# EAGLE board piccolo_pcb_v0.9.1 (EAGLE 7.1.0)
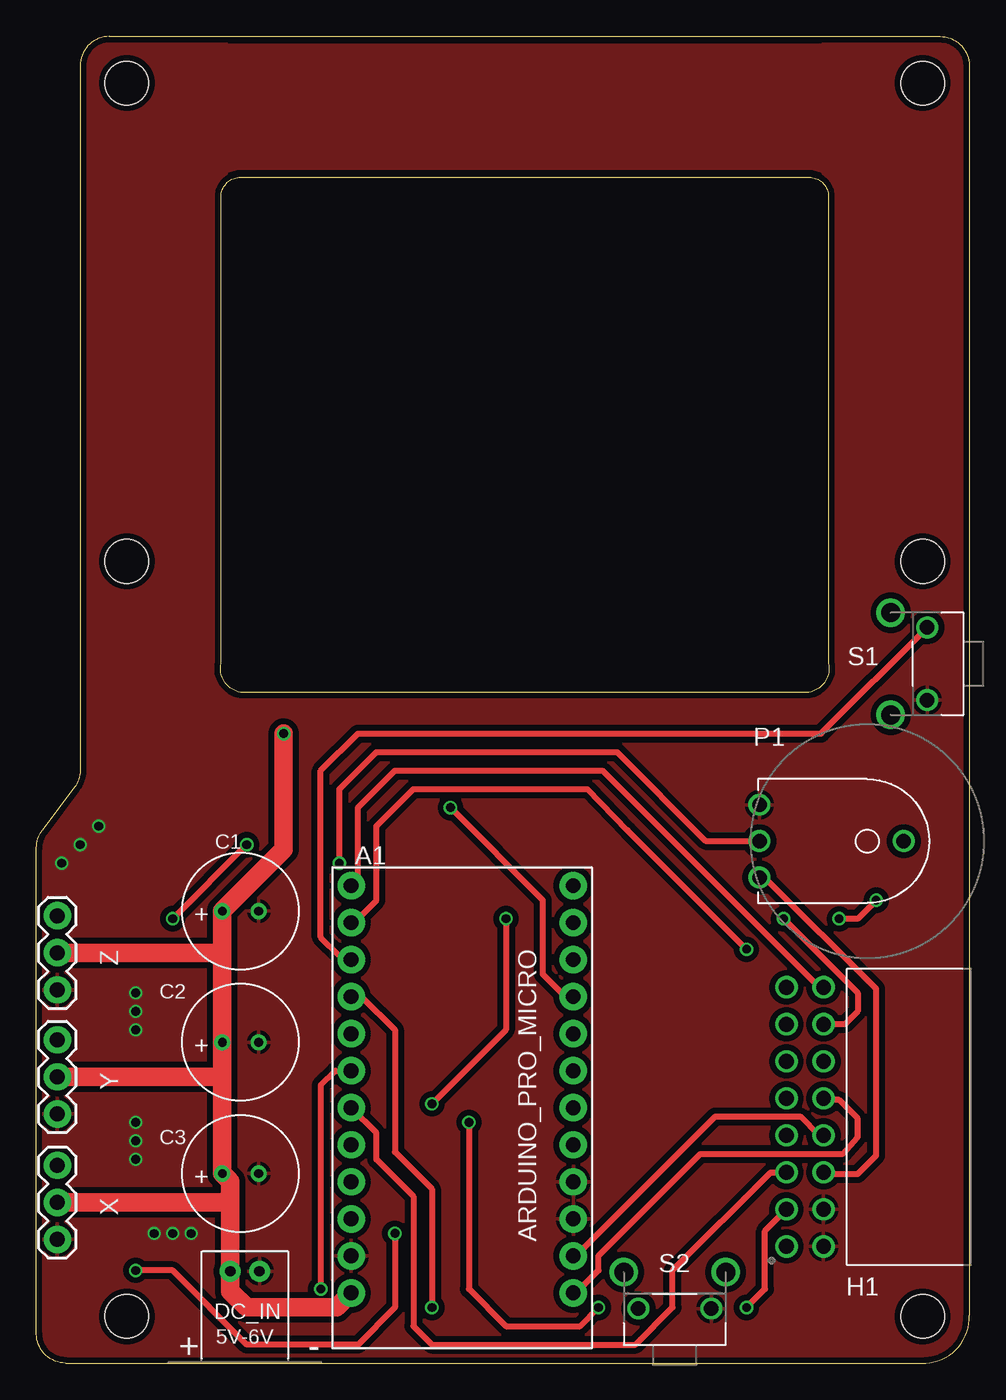
[diagram p0: board, top side]
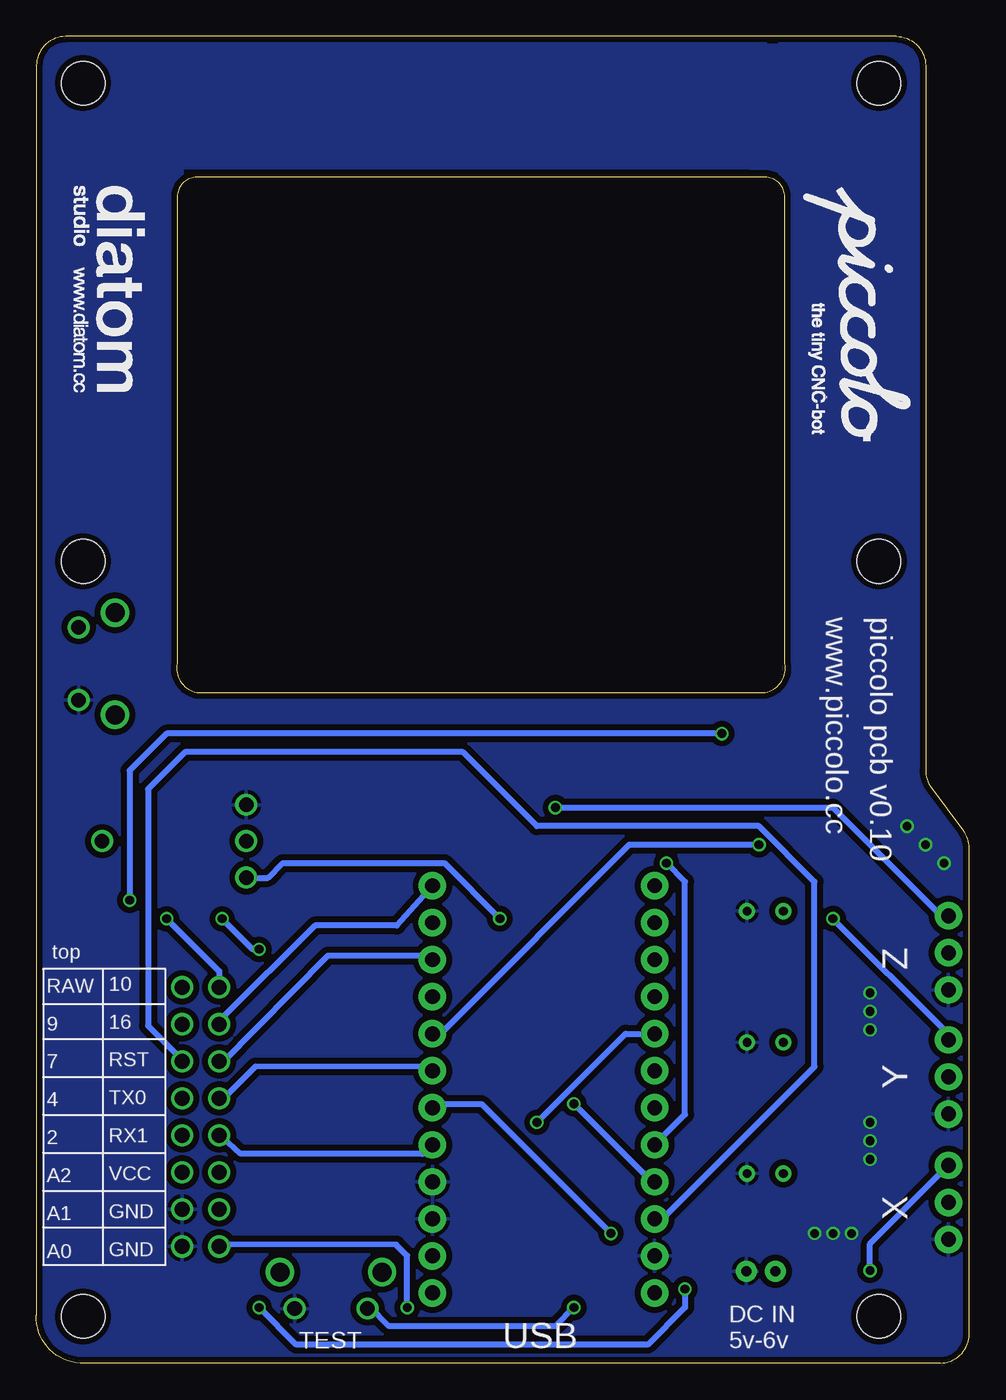
[diagram p1: board, bottom side, seen from below]

Size 64 x 91 mm. Coordinates in mm from the lower left corner, seen from the top.
Outline: 0,2 0,35.33 arc-37 0.4,36.53 2.6,39.47 arc37 3,40.67 3,89 arc-90 5,91 62,91 arc-90 64,89 64,3.27 arc-90 61,0 2,0 arc-90 0,2
Outline: 12.66,48 12.66,80 arc-90 14,81.34 53,81.34 arc-90 54.34,80 54.34,48 arc-90 53,46 14,46 arc-90 12.66,48
Copper layers (1*16): Top 0.035mm / dielectric 1.5mm / Bottom 0.035mm
Design rules "ITEADstudio_DRC": minimum track width 6mil, minimum drill 12mil, track to track 6mil, track to pad 6mil, pad to pad 6mil, via to via 6mil, smd to smd 0mil, copper to edge 10mil, drill to drill 10mil, minimum pad ring 10mil, minimum via ring 6mil, stop-mask expansion 2mil, vias tented up to drill 100mil, thermal gap 10mil
Holes 3 mm at 6.2,87.8 6.2,55 6.2,3.2 60.8,3.2 60.8,55 60.8,87.8

## Footprints (pad centres in the part's own frame; a part is rotated, then mirrored left to right if it is on the bottom)
ARDUINO_MINI = drill 1.016 pad 1.88: 1 -7.62,12.7; 2 -7.62,10.16; 3 -7.62,7.62; 4 -7.62,5.08; 5 -7.62,2.54; 6 -7.62,0; 7 -7.62,-2.54; 8 -7.62,-5.08; 9 -7.62,-7.62; 10 -7.62,-10.16; 11 -7.62,-12.7; 12 -7.62,-15.24; 13 7.62,-15.24; 14 7.62,-12.7; 15 7.62,-10.16; 16 7.62,-7.62; 17 7.62,-5.08; 18 7.62,-2.54; 19 7.62,0; 20 7.62,2.54; 21 7.62,5.08; 22 7.62,7.62; 23 7.62,10.16; 24 7.62,12.7
RADIAL_330UF = drill 0.6: A 0,1.25; C 0,-1.25
JST-PH-2-PTH = drill 0.7 pad 1.448: + -1,0; - 1,0
PTH_2X8_90DEG_FEMALE = drill 1.02: P$1 -2.54,0; P$2 0,0; P$3 -2.54,2.54; P$4 0,2.54; P$5 -2.54,5.08; P$6 0,5.08; P$7 -2.54,7.62; P$8 0,7.62; P$9 -2.54,10.16; P$10 0,10.16; P$11 -2.54,12.7; P$12 0,12.7; P$13 -2.54,15.24; P$14 0,15.24; P$15 -2.54,17.78; P$16 0,17.78
16MM_THUMBWHEEL = drill 1: P$1 -2.5,-7.4; P$2 0,-7.4; P$3 2.5,-7.4; P$4 0,2.5
RIGHT_ANGLE_TACTSWITCH = drill 1: 1 -2.5,0; 2 2.5,0 | drill 1.3: PE1 -3.5,2.5; PE2 3.5,2.5
1X03 = drill 1.016 pad 1.88: 1 0,0; 2 2.54,0; 3 5.08,0

## Placement (x,y rotation side)
A1  ARDUINO_PRO_MICRO  [ARDUINO_MINI]  29.21,17.51 180 top
C1  CAP_ELECTROLYTIC  [RADIAL_330UF]  14,31 90 top
C2  CAP_ELECTROLYTIC  [RADIAL_330UF]  14,22 90 top
C3  CAP_ELECTROLYTIC  [RADIAL_330UF]  14,13 90 top
DC_IN  4.8v-6.0v  [JST-PH-2-PTH]  14.3,6.3 0 top
H1  M08X2  [PTH_2X8_90DEG_FEMALE]  54,8 0 top
P1  [16MM_THUMBWHEEL]  57,35.8 270 top
S1  SWITCH_TACTILE  [RIGHT_ANGLE_TACTSWITCH]  61.11,47.97 90 top
S2  SWITCH_TACTILE  [RIGHT_ANGLE_TACTSWITCH]  43.79,3.74 0 top
U$1  [VHS-LOGO-SMALL]  41.1,81.28 0 bottom
X  [1X03]  1.43,8.48 90 top
Y  [1X03]  1.43,17.09 90 top
Z  [1X03]  1.43,25.6 90 top

## Library data of the parts
A1 = SparkFun-Boards
C1-C3 H1 P1 S1 S2 = Piccolo
DC_IN = Piccolo; 5V-6V: 5v-6v
U$1 = mechanical
X Y Z = SparkFun-Connectors

## Nets
A3: A1.20 P1.P$2
GND: A1.3 A1.4 A1.23 C1.C C2.C C3.C DC_IN.- H1.P$2 H1.P$4 P1.P$1 S1.1 S2.2 X.1 Y.1 Z.1
N$3: A1.15 S1.2
N$4: A1.16 S2.1
PIN2: A1.5 H1.P$7
PIN4: A1.7 H1.P$9
PIN7: A1.10 H1.P$11
PIN9: A1.12 H1.P$13
PIN10: A1.13 H1.P$16
PIN16: A1.14 H1.P$14
PIN_A0: A1.17 H1.P$1
PIN_A1: A1.18 H1.P$3
PIN_A2: A1.19 H1.P$5
PWR_RAW: A1.24 C1.A C2.A C3.A DC_IN.+ H1.P$15 X.2 Y.2 Z.2
RESET: A1.22 H1.P$12
RX: A1.2 H1.P$8
TX: A1.1 H1.P$10
VCC: A1.21 H1.P$6 P1.P$3
X_PWM_PIN3: A1.6 X.3
Y_PWM_PIN5: A1.8 Y.3
Z_PWM_PIN6: A1.9 Z.3

## Tracks (layer width: path | path; a pad name or v marks a point on that pad's centre or on a via)
A3  (via drill 0.61)
  Top 0.254: 49.99,35.83 P1.P$2
  Top 0.406: 49.99,35.83 45.91,35.83 39.83,41.91 23.32,41.91 20.78,39.37 v20.78,34.29
  Bottom 0.406: v20.78,34.29 19.51,33.02 19.51,17.05 A1.20
GND  (via drill 0.6)
  other vias: 8.08,8.89 9.35,8.89 10.62,8.89 6.81,16.51 6.81,15.24 6.81,13.97 6.81,25.4 6.81,24.13 6.81,22.86 3,35.56 4.27,36.83 1.73,34.29
  pour Bottom (isolate 0.406): 62,91 14,91 14,82 54,82 54,46 13,46 13,91 5,91 arc90 3,89 3,40 0,36 0,2 arc90 2,0 62,0 arc90 64,2 64,89 arc90
  pour Top (isolate 0.406): 62,91 54,91 54,46 13,46 13,91 5,91 arc90 3,89 3,40 0,36 0,2 arc90 2,0 62,0 arc90 64,3.27 64,90.27 arc90
  pour Bottom (isolate 0.5): 12,91 15,91 15,81 12,81
  pour Top (isolate 0.5): 13,91 54,91 54,81 13,81
N$3
  Top 0.406: A1.15 20.78,27.94 19.51,29.21 19.51,40.64 22.05,43.18 53.82,43.18 S1.2
N$4  (via drill 0.61)
  Top 0.406: v27.13,3.81 27.13,11.94 24.59,14.48 24.59,22.86 22.32,25.13 A1.16
  Bottom 0.406: v27.13,3.81 28.4,2.54 39.83,2.54 41.1,3.81 S2.1
PIN2
  Bottom 0.254: 51.26,15.51 H1.P$7
  Bottom 0.406: 51.26,15.51 49.99,14.37 37.54,14.35 A1.5
PIN4
  Bottom 0.254: 51.26,18.05 H1.P$9
  Bottom 0.406: 51.26,18.05 48.97,20.34 37.29,20.32 A1.7
PIN7
  Bottom 0.254: 51.26,20.59 H1.P$11
  Bottom 0.406: 51.26,20.59 44.02,27.94 37.29,27.94 A1.10
PIN9
  Bottom 0.406: 51.26,23.67 44.89,30.02 39.29,30.02 A1.12
  Bottom 0.61: H1.P$13 arc-90 51.26,23.44 51.26,23.67
PIN10
  Top 0.254: 53.8,25.67 H1.P$16
  Top 0.406: 53.8,25.67 38.83,40.64 24.59,40.64 22.05,38.1 22.05,33.02 A1.13
PIN16  (via drill 0.6)
  Top 0.406: A1.14 22.05,30.48 23.32,31.75 23.32,36.83 25.86,39.37 37.8,39.37 40.56,36.54 v48.72,28.38 | v51.26,30.48 56.34,25.4 56.34,24.13 55.45,23.24 H1.P$14
  Bottom 0.406: v48.72,28.38 49.16,28.38 v51.26,30.48
PIN_A0  (via drill 0.61, 0.61 pad 0.66)
  Top 0.406: v38.56,3.81 37.29,2.54 32.21,2.54 29.67,5.08 v29.67,16.51
  Bottom 0.254: 51.26,7.89 H1.P$1
  Bottom 0.406: 51.26,7.89 51.01,8.14 39.32,8.13 38.56,7.37 v38.56,3.81 | v29.67,16.51 23.59,22.59 A1.17
PIN_A1  (via drill 0.6, 0.61)
  Top 0.406: v19.51,5.08 19.51,19.05 20.51,20.05 A1.18 | v48.72,3.81 49.99,5.08 49.99,9.07 H1.P$3
  Bottom 0.406: v19.51,5.08 19.51,3.81 22.05,1.27 46.18,1.27 v48.72,3.81
PIN_A2
  Top 0.254: 51.26,13.1 H1.P$5
  Top 0.406: 51.26,13.1 50.37,13.08 43.64,6.35 43.64,3.81 41.1,1.27 27.13,1.27 25.86,2.54 25.86,11.43 23.32,13.97 23.32,15.78 A1.19
PWR_RAW  (via drill 0.6, 0.61)
  Top 0.406: v57.61,31.75 56.34,30.48 v55.07,30.48
  Top 1.27: 13.3,11.43 DC_IN.+ 13.3,4.94 14.43,3.81 20.59,3.81 A1.24 | 13.3,11.43 13.3,12.45 C3.A 12.75,19.63 | 12.75,19.63 C2.A 12.75,28.14 | 12.75,28.14 C1.A 16.97,35.22 v16.97,43.18 | X.2 12.89,11.02 13.3,11.43 | Y.2 12.75,19.63 | Z.2 12.75,28.14
  Bottom 0.25: 51.26,25.67 H1.P$15
  Bottom 0.406: v16.97,43.18 55.07,43.18 57.61,40.64 v57.61,31.75 | v55.07,30.48 51.46,26.87 H1.P$15
RESET
  Bottom 0.254: 53.8,20.59 H1.P$12 | 20.78,10.16 A1.22
  Bottom 0.406: 53.8,20.59 56.34,23.13 56.34,39.37 53.8,41.91 34.75,41.91 29.67,36.83 14.43,36.83 10.62,33.02 10.62,20.32 20.78,10.16
RX
  Top 0.254: 37.29,7.62 A1.2 | H1.P$8 53.69,15.62
  Top 0.406: 53.69,15.62 52.4,16.91 46.58,16.91 37.29,7.62
TX
  Top 0.254: 54.11,18.05 H1.P$10
  Top 0.406: A1.1 37.29,5.08 38.56,6.35 38.56,7.37 45.55,14.35 55.32,14.37 56.34,15.51 56.34,16.78 55.07,18.05 54.11,18.05
VCC  (via drill 0.61)
  Top 0.254: 49.99,33.29 P1.P$3 | 53.8,12.97 H1.P$6
  Top 0.406: 49.99,33.29 57.61,25.67 57.61,14.24 56.34,12.97 53.8,12.97 | v27.13,17.78 32.21,22.86 v32.21,30.48
  Bottom 0.254: 22.05,12.7 A1.21 | 49.99,33.29 P1.P$3
  Bottom 0.406: v27.13,17.78 22.05,12.7 | v32.21,30.48 36.02,34.29 47.1,34.3 48.11,33.29 49.99,33.29
X_PWM_PIN3  (via drill 0.6, 0.61)
  Top 0.406: v24.59,8.89 24.59,3.81 22.05,1.27 14.43,1.27 9.35,6.35 v6.81,6.35
  Bottom 0.406: v24.59,8.89 33.48,17.78 36.02,17.78 A1.6 | v6.81,6.35 6.81,8.18 X.3
Y_PWM_PIN5  (via drill 0.61)
  Top 0.406: v14.43,35.56 v9.35,30.48
  Bottom 0.254: 1.73,22.86 Y.3 | 36.02,22.86 A1.8
  Bottom 0.406: v9.35,30.48 1.73,22.86 | v14.43,35.56 23.32,35.56 36.02,22.86
Z_PWM_PIN6  (via drill 0.61)
  Top 0.406: v28.4,38.1 34.75,31.75 34.75,26.67 36.02,25.4 A1.9
  Bottom 0.254: 1.73,30.48 Z.3
  Bottom 0.406: 1.73,30.48 9.35,38.1 v28.4,38.1

## Text on the board
bPlace: C:/Users/BG/Downloads/diatom_logo_1bit.bmp | piccolo pcb v0.10 | www.piccolo.cc
bNames: Z | top | Y | X | 10 / 16 / RST / TX0 / RX1 / VCC / GND / GND | RAW / 9 / 7 / 4 / 2 / A2 / A1 / A0 | DC IN / 5v-6v | USB | TEST